# Allegro board BVNCB.brd
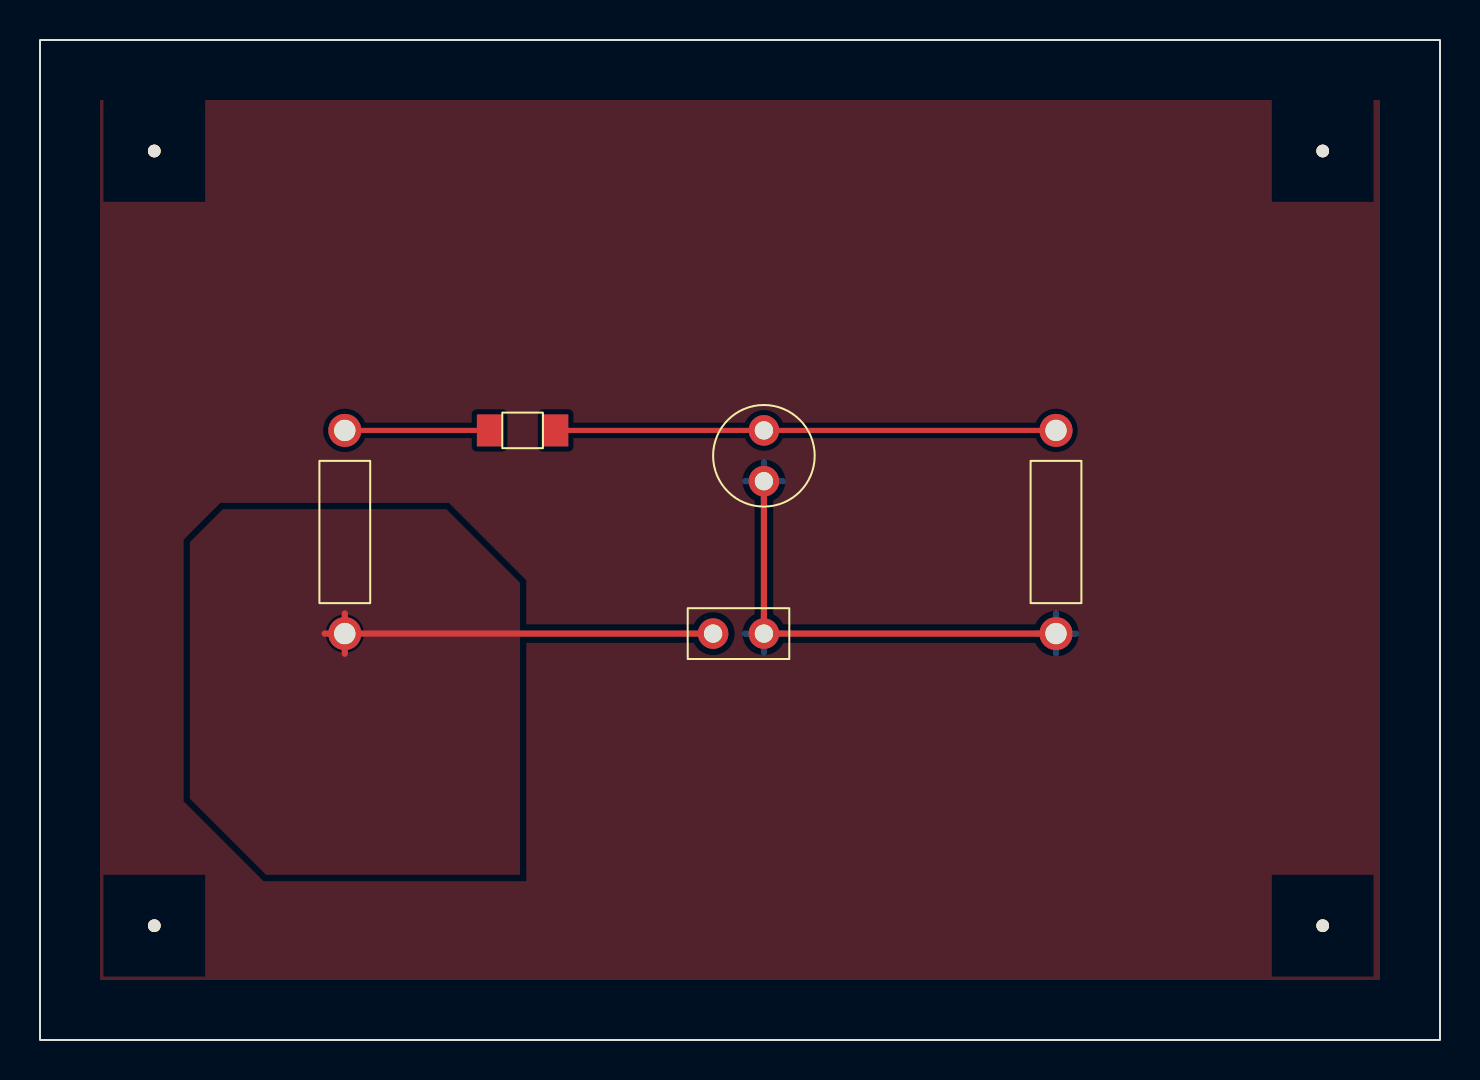
[diagram p0: board, top side]
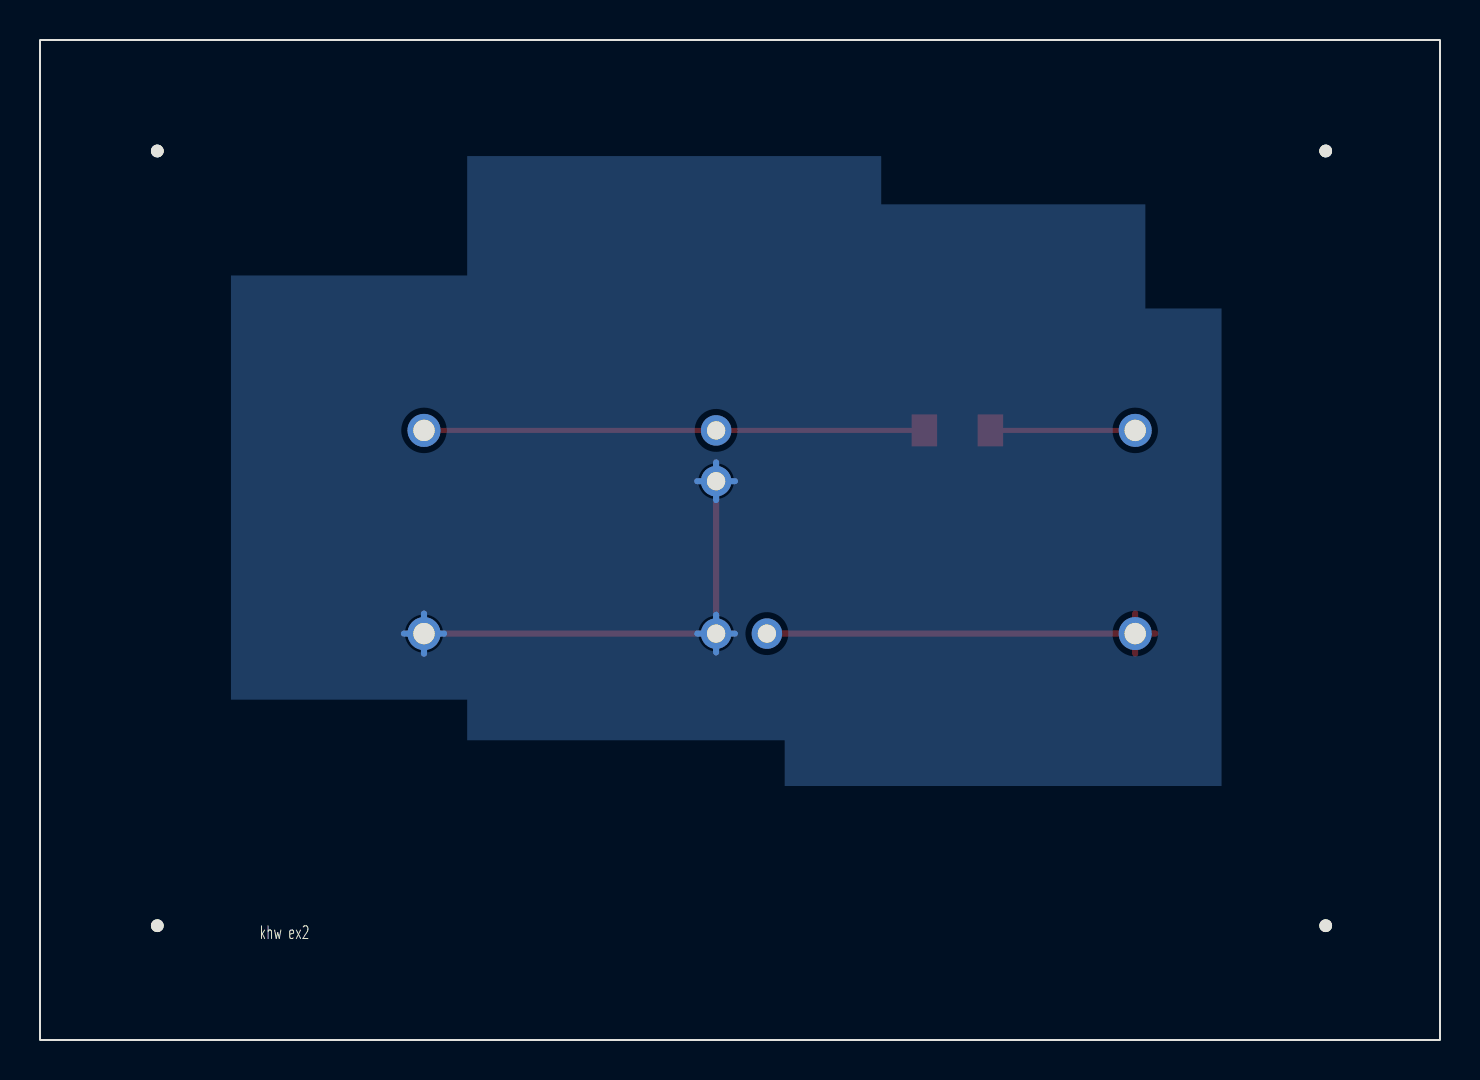
[diagram p1: board, bottom side, seen from below]

Outline 70 x 50 mm; copper layers: TOP, BOTTOM. Coordinates in mm from the lower left corner of the outline.
Outline path: rectangle 0,0 70,50

## Design rules (mm)
constraint set DEFAULT: min track width 0.254
net group BASENETS: nets K N00096

## Placement (name value [footprint] x y rotation side)
C1  1u  [CAP196]  36.2 27.94 0 top
J1  CON2  [JUMPER2]  33.66 20.32 0 top
L1  100n  [SMDRES]  24.13 30.48 0 top
NOREF  -  [unnamed]  64.14 5.71 0 top
NOREF#2  -  [unnamed]  5.71 44.45 0 top
NOREF#3  -  [unnamed]  5.71 5.71 0 top
NOREF#4  -  [unnamed]  64.14 44.45 0 top
R1  330  [RES400]  15.24 20.32 0 top
R2  330  [RES400]  50.8 30.48 180 top

## Library data of the parts
C1 = CAP NP: Tolerance: ***; User Part Number: ***
J1 = CON2: User Part Number: ***
L1 = INDUCTOR: Tolerance: ***; User Part Number: ***
R1 R2 = R: Tolerance: ***; User Part Number: ***

## Footprints (pads in the part's own frame, mm; a bottom-side part is the same pattern mirrored in y, then rotated)
CAP196
  round 1.524 hole 0.914: 1(0,0) 2(0,2.54)
JUMPER2
  round 1.524 hole 0.914: 1(0,0) 2(2.54,0)
RES400
  round 1.651 hole 1.067: 1(0,0) 2(0,10.16)
SMDRES
  rect 1.27x1.6 smd: 1(-1.651,0) 2(1.651,0)
unnamed
  round 0.635 hole 3.175 unplated: (0,0)

## Nets
GND: C1.1 J1.2 R2.2
VCC: J1.1 R1.1
K: L1.1 R1.2
N00096: C1.2 L1.2 R2.1

## Routing (per net, layer and track width the routed paths; a pad name or vN(x,y) marks a point on that pad's centre or on a via; arc(x,y) is an arc through that point)
GND: length 33.8
  TOP w0.308: C1.1 J1.2 R2.2
  BOTTOM w0.308: 36.2,19.38 J1.2 ; J1.2 37.14,20.32 ; J1.2 36.2,21.26 ; J1.2 35.25,20.32 ; R2.2 50.8,21.33 ; R2.2 51.81,20.32 ; R2.2 49.79,20.32 ; R2.2 50.8,19.31 ; 36.2,27 C1.1 ; C1.1 36.2,28.88 ; C1.1 35.25,27.94 ; C1.1 37.14,27.94
VCC: length 21.4
  TOP w0.308: R1.1 15.24,21.33 ; R1.1 14.23,20.32 ; R1.1 J1.1 ; R1.1 15.24,19.31
K: length 7.2
  TOP w0.254: R1.2 L1.1
N00096: length 25
  TOP w0.254: R2.1 C1.2 L1.2

## Copper pours and planes (outline as drawn; the poured copper is in the pictures)
GND on BOTTOM: 27.94,44.2 48.64,44.2 48.64,38.23 60.45,38.23 60.45,17.02 48.64,17.02 48.64,14.99 32.77,14.99 32.77,12.7 10.92,12.7 10.92,36.58 14.73,36.58 14.73,41.78 27.94,41.78
VCC on TOP: 9.14,26.54 20.32,26.54 24,22.86 24,8.26 11.3,8.26 7.49,12.06 7.49,24.89
Net_2 on TOP: 67,3 3,3 3,47 67,47

## Text on the board
Ref Des/Silkscreen Bottom: khw ex2
TOLERANCE_TOP: FIGURE | FINISHED_SIZE | 0.914 | 1.067 | 3.175 | DRILL CHART: TOP to BOTTOM | ALL UNITS ARE IN MILLIMETERS | PLATED | NON-PLATED | QTY | 4
